# Altium PCB PCB_2020-10-29_13-03-39_2020-11-11_17-29-31.pcbdoc
Units mil, origin at the board's own origin, x right, y up, seen from the top; angles counter-clockwise.
Board outline 1802.4 x 1802.4 mil, 2 copper layers (Top Layer, Bottom Layer); 8 components, 16 nets, 37 pads, 1 vias.
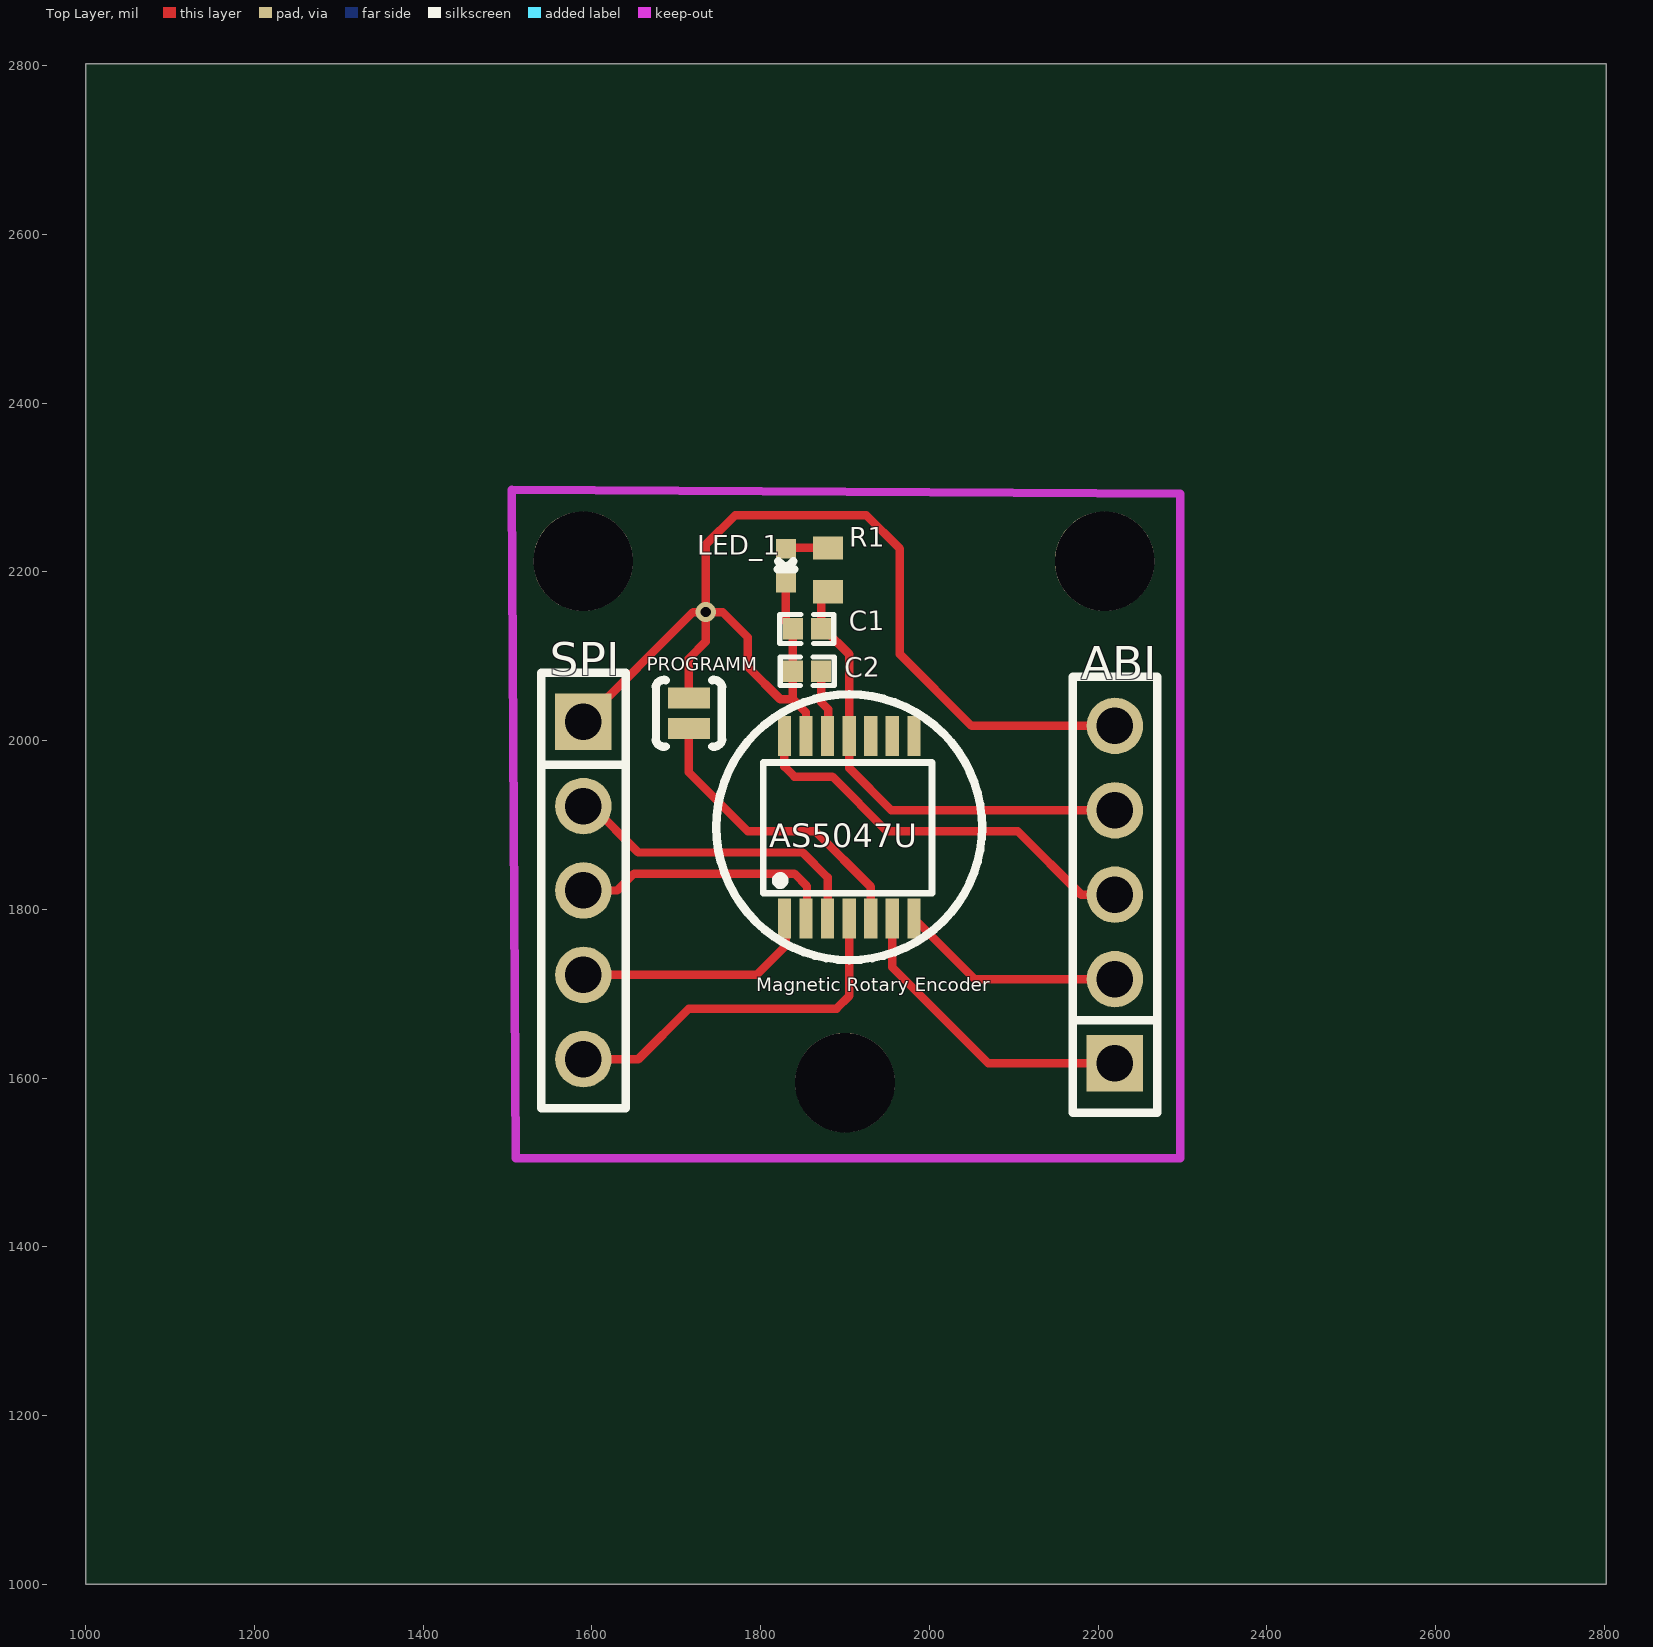
[diagram p0: Top Layer view]
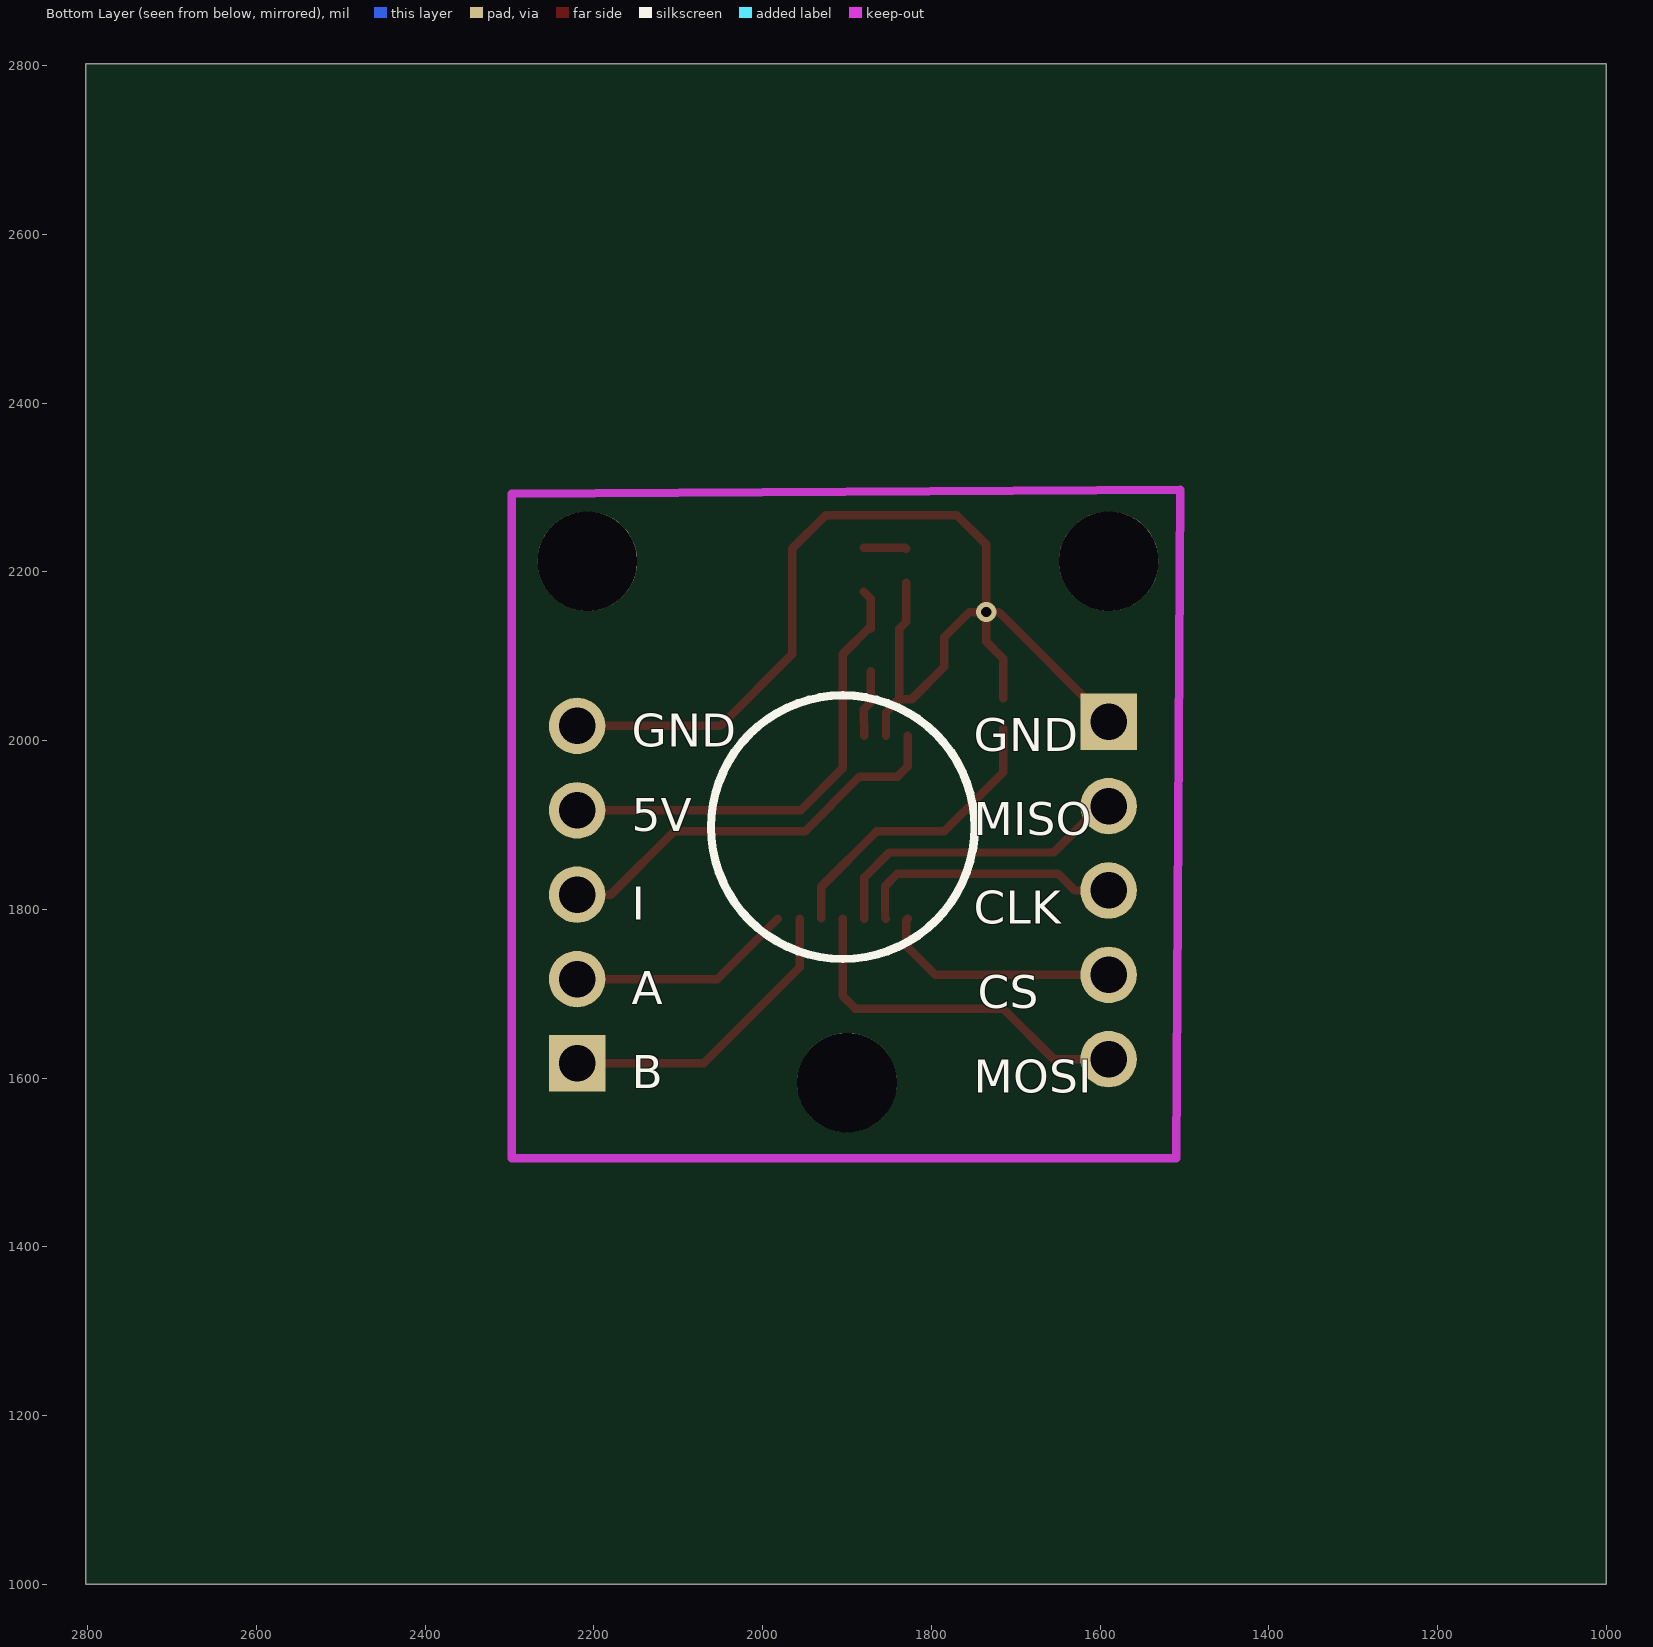
[diagram p1: Bottom Layer view, seen from below]

## Layer stack, top to bottom
Top Layer: signal copper (thickness not stored)
Dielectric: dielectric 12.6, FR-4, Dk 4.8
Bottom Layer: signal copper (thickness not stored)

## Board outline
2802.4,1000 1000,1000 1000,2802.4 2802.4,2802.4

## Components (designator, comment, footprint, x,y, rotation, side; value= is the part's Value field where it differs from the comment)
ABI "Header-Male-2.54_1x5" HDR-TH_5P-P2.54-V-M 2220,1817.4 r90 top
AS5047U "AS5047U" AS5047U 1904.97,1897.43 r90 top
C1 "100nF" 0402 1855,2132.4 r0 top
C2 "1uF" 0402 1855,2082.4 r180 top
LED_1 "LED_Green_0402" 0402-DIODE 1830,2207.4 r270 top
PROGRAMM "SOLDERJUMPER-OLDNO" SJ_2S-NO 1715,2032.4 r90 top
R1 "100R_0402" 0402-RES 1880,2202.4 r270 top
SPI "Header-Male-2.54_1x5" HDR-TH_5P-P2.54-V-M 1590,1822.4 r270 top

## Footprints (in the part's own frame and the unit in brackets; to place one, negate y for a bottom-side part, rotate by r counter-clockwise, add the part's x,y. Pads: shape width x height; smd on the part's side, far side on the other; paste and mask are expansions set on the pad)
0402 [mil]
  rect 23.62x25.58 smd: 1(-16.7,0) 2(16.7,0)
  silkscreen extent -32,-17 32,17
0402-DIODE [mil]
  rect 23.6x23.6 smd: A(-20,0) C(20,0)
  silkscreen extent -5,-10 4,10
0402-RES [mil]
  rect 27.6x35.4 smd: 1(-26,0) 2(26,0)
AS5047U [mm]
  rect 1.2x0.4 smd: 1(-2.75,1.95) 2(-2.75,1.3) 3(-2.75,0.65) 4(-2.75,0) 5(-2.75,-0.65) 6(-2.75,-1.3) 7(-2.75,-1.95) 8(2.75,-1.95) 9(2.75,-1.3) 10(2.75,-0.65) 11(2.75,0) 12(2.75,0.65) 13(2.75,1.3) 14(2.75,1.95)
  silkscreen extent -1.99,-2.49 1.95,2.59
HDR-TH_5P-P2.54-V-M [mm]
  rect 1.7x1.7 hole 1.1: 1(-5.08,0)
  round 1.7 hole 1.1: 2(-2.54,0) 3(0,0) 4(2.54,0) 5(5.08,0)
  silkscreen extent -6.56,-1.27 6.56,1.27
SJ_2S-NO [mil]
  rect 25x50 smd: 1(-18,0) 2(18,0)
  silkscreen extent -40,-39 40,39

## Free pads (board coordinates)
  round 118.11 hole 118.11 unplated: ""(1589.65,2212.75) ""(1900,1594.64) ""(2207.76,2212.75)

## Via types
v1: diameter 24, hole 12, Top Layer to Bottom Layer, 1 vias

## Nets (pads, with @x,y where several pads share a name; then routed paths per layer and width w, separated by ;. In a path a pad name is that pad's centre, name@x,y a point inside that pad or via, vN(x,y) a via of type N, cw(c..) or ccw(c..) an arc to the next point about the centre after c; other vN are vias at no path point)
R1_1: LED_1.A R1.1 | length 50.4
  Top Layer w10: LED_1.A 1831,2228.4 R1.1
S$512: 
U1_1: AS5047U.1 SPI.4 | length 287
  Top Layer w10: SPI.4 1795,1722.4 1830,1757.4 1830,1787.36 AS5047U.1@1828.23,1789.13
U1_2: AS5047U.2 SPI.3 | length 318.3
  Top Layer w10: SPI.3 1630,1822.4 1650,1842.4 1840,1842.4 1855,1827.4 1855,1790.32 AS5047U.2@1853.82,1789.13
U1_3: AS5047U.3 SPI.2 | length 373.2
  Top Layer w10: SPI.2 1600,1922.4 1655,1867.4 1850,1867.4 1879.41,1837.99 AS5047U.3@1879.41,1789.13
U1_4: AS5047U.4 SPI.5 | length 437.8
  Top Layer w10: SPI.5 1655,1622.4 1715,1682.4 1890,1682.4 1905,1697.4 AS5047U.4@1905,1789.13
U1_5: AS5047U.5 PROGRAMM.1 | length 361.4
  Top Layer w10: PROGRAMM.1 1715,1962.4 1785,1892.4 1865,1892.4 1930.56,1826.85 AS5047U.5
U1_6: ABI.1 AS5047U.6 | length 368.9
  Top Layer w10: AS5047U.6@1956.18,1789.13 1956.18,1731.22 2070,1617.4 ABI.1
U1_7: ABI.2 AS5047U.7 | length 267.9
  Top Layer w10: AS5047U.7@1981.77,1789.13 2053.5,1717.4 ABI.2
U1_8: AS5047U.8
U1_9: AS5047U.9
U1_10: AS5047U.10
U1_11: ABI.4 AS5047U.11 C1.2 R1.2 | length 563.9
  Top Layer w10: R1.2 1871.7,2168.1 C1.2 1875,2132.4 1905,2102.4 AS5047U.11 1905,1967.4 1955,1917.4 ABI.4
U1_12: AS5047U.12 C2.1 | length 80.2
  Top Layer w10: C2.1 1871.7,2045.7 1880,2037.4 AS5047U.12
U1_13: ABI.5 AS5047U.13 C1.1 C2.2 LED_1.C PROGRAMM.2 SPI.1 | length 1426.5
  Top Layer w10: SPI.1 1720,2152.4 v1(1735,2152.4) ; PROGRAMM.2 1715,2097.4 1735,2117.4 v1(1735,2152.4) ; LED_1.C@1830,2184.52 LED_1.C 1830,2140.7 C1.1 C2.2 1838.3,2049.1 ; AS5047U.13 1853.82,2033.58 1838.3,2049.1 ; ABI.5 2050,2017.4 1965,2102.4 1965,2227.4 1925,2267.4 1770,2267.4 1735,2232.4 v1(1735,2152.4) ; v1(1735,2152.4) 1755,2152.4 1785,2122.4 1785,2087.4 1823.3,2049.1 1838.3,2049.1
U1_14: ABI.3 AS5047U.14 | length 491.1
  Top Layer w10: AS5047U.14 1828.23,1969.17 1840,1957.4 1885,1957.4 1950,1892.4 2105,1892.4 2180,1817.4 ABI.3

## Silkscreen, mask and mechanical layers (free items; w line width, h text height)
Top Overlay:
  circle w10 net S$512: c1905,1897.4 r157.48
  text "Magnetic Rotary Encoder" at 1795,1697.4 h27.56
Bottom Overlay:
  circle w10: c1905,1897.4 r156.21
  text "GND" at 2155,1992.72 h39.37
  text "GND" at 1750,1987.72 h39.37
  text "5V" at 2155,1892.72 h39.37
  text "MISO" at 1750,1887.72 h39.37
  text "I" at 2155,1787.72 h39.37
  text "CLK" at 1750,1782.72 h39.37
  text "A" at 2155,1687.72 h39.37
  text "CS" at 1745,1682.72 h39.37
  text "B" at 2155,1587.72 h39.37
  text "MOSI" at 1750,1582.72 h39.37